# EAGLE board espButton (EAGLE 9.0.1)
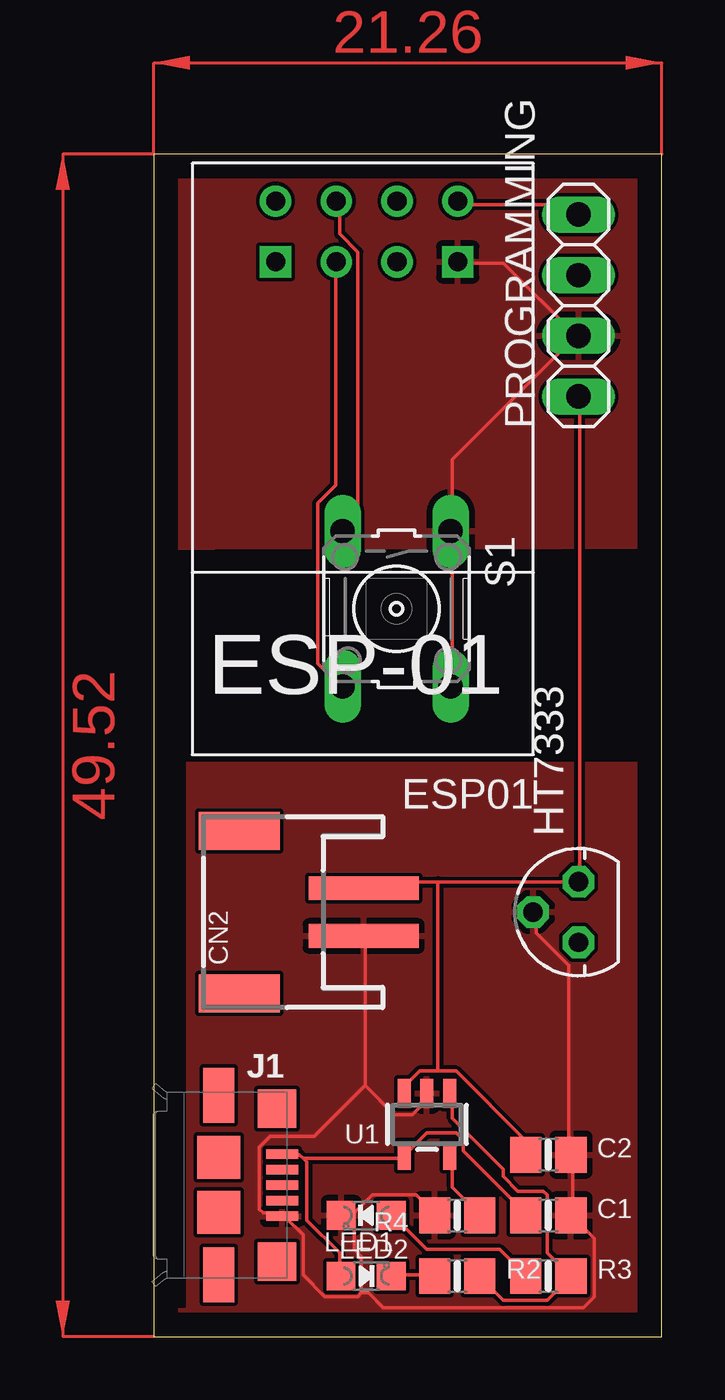
[diagram p0: board, top side]
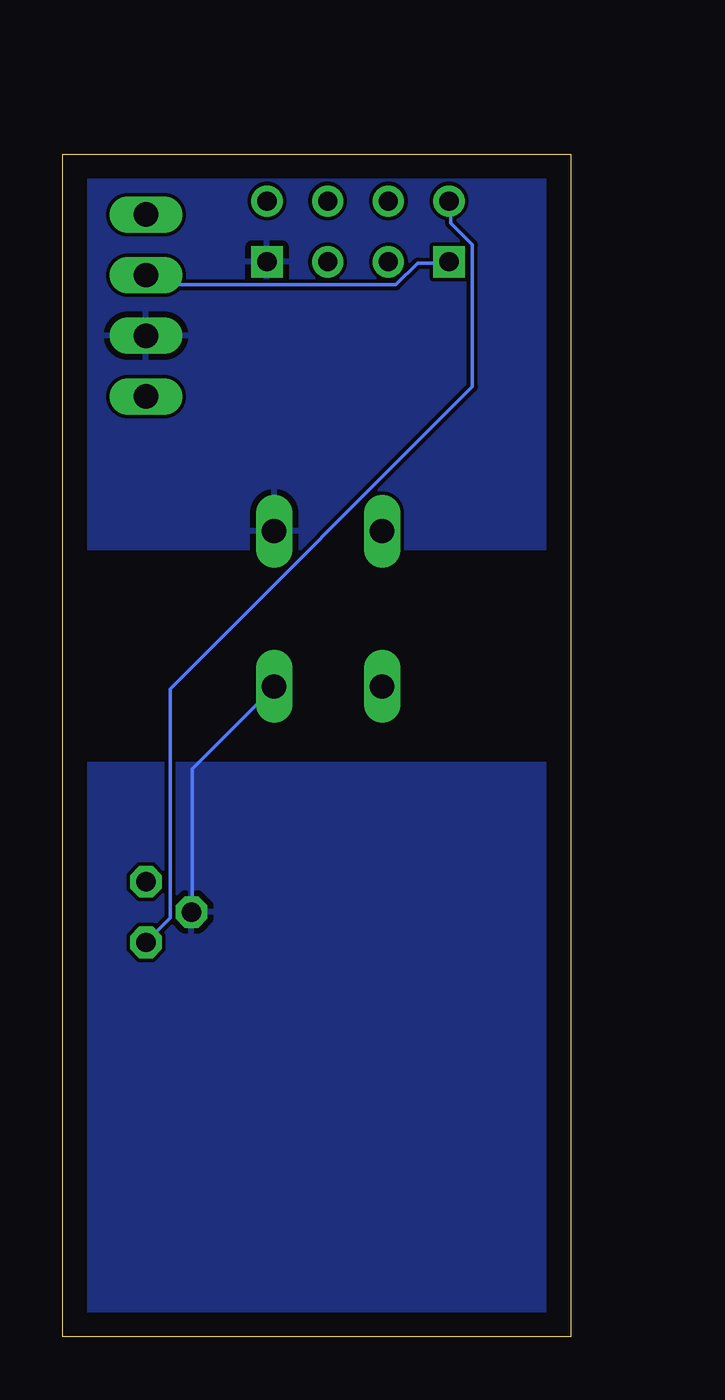
[diagram p1: board, bottom side, seen from below]

Size 21.26 x 49.52 mm. Coordinates in mm from the lower left corner, seen from the top.
Outline: 0,0 21.26,0 21.26,49.52 0,49.52 0,0
Copper layers (1*16): Top 0.035mm / dielectric 1.5mm / Bottom 0.035mm
Design rules "default": minimum track width 6mil, minimum drill 0.35mm, track to track 6mil, track to pad 6mil, pad to pad 6mil, via to via 6mil, smd to smd 6mil, copper to edge 40mil, drill to drill 6mil, minimum pad ring 10mil, minimum via ring 8mil, stop-mask expansion 4mil, vias tented up to drill 0mil, thermal gap 10mil

## Footprints (pad centres in the part's own frame; a part is rotated, then mirrored left to right if it is on the bottom)
0805-NO = smd 1.3 x 1.5: 1 -0.95,0; 2 0.95,0
JSTPH2 = smd 1 x 4.6: 1 -1,-3.7; 2 1,-3.7 | smd 1.6 x 3.4: NC1 -3.4,1.5; NC2 3.4,1.5
ESP01 = drill 0.8: CH_PD -1.285,-8.178; GPIO0 1.255,-5.638; GPIO2 -1.285,-5.638; RST 1.255,-8.178; TX -3.825,-8.178; VCC 3.795,-8.178 | drill 0.8 square: GND -3.825,-5.638; RX 3.795,-5.638
78LXX = drill 0.813 octagon: GND 0,1.905; IN 1.27,0; OUT -1.27,0
1981584-1 = smd 0.4 x 1.35: 1 -1.3,4.1; 2 -0.65,4.1; 3 0,4.1; 4 0.65,4.1; 5 1.3,4.1 | smd 1.8 x 1.8: M1 -1.15,1.45; M2 1.15,1.45 | smd 2.3 x 1.3: S1 -3.75,1.45; S2 3.75,1.45 | smd 1.6 x 1.6: S3 -3.2,3.885; S4 3.2,3.885
CHIPLED_0805_NOOUTLINE = smd 1.2 x 1.2: A 0,-1.05; C 0,1.05
1X04 = drill 1.016 long: 1 -3.81,0; 2 -1.27,0; 3 1.27,0; 4 3.81,0
B3F-10XX = drill 1.016 long: 1 -3.251,2.261; 2 3.251,2.261; 3 -3.251,-2.261; 4 3.251,-2.261
SOT23-5 = smd 0.55 x 1.2: 1 -0.95,-1.3; 2 0,-1.3; 3 0.95,-1.3; 4 0.95,1.3; 5 -0.95,1.3

## Placement (x,y rotation side)
C1  10µF  [0805-NO]  16.51,5.08 0 top
C2  10µF  [0805-NO]  16.51,7.62 0 top
CN2  JSTPH  [JSTPH2]  5.08,17.78 90 top
ESP01  ESP01  [ESP01]  8.89,39.37 180 top
HT7333  [78LXX]  17.78,17.78 90 top
J1  1981584-1  [1981584-1]  1.27,6.35 270 top
LED1  RED  [CHIPLED_0805_NOOUTLINE]  8.89,2.54 270 top
LED2  GREEN  [CHIPLED_0805_NOOUTLINE]  8.89,5.08 90 top
PROGRAMMING  [1X04]  17.78,43.18 90 top
R2  470  [0805-NO]  12.7,2.54 0 top
R3  470  [0805-NO]  16.51,2.54 0 top
R4  10K\  [0805-NO]  12.7,5.08 180 top
S1  [B3F-10XX]  10.16,30.48 270 top
U1  MCP73831T-2ACI/OT  [SOT23-5]  11.43,8.89 180 top

## Library data of the parts
C1 C2 CN2 LED1 LED2 R2-R4 U1 = microbuilder
ESP01 = esp8266modules
HT7333 PROGRAMMING = DC_LOAD_AU
J1 = audio amplifier example
S1 = DC_LOAD_AU; MPN: B3F-1000; OC_FARNELL: 176432; OC_NEWARK: 36M3542

## Nets
3V3: ESP01.VCC HT7333.OUT
BAT: C2.1 CN2.2 HT7333.IN PROGRAMMING.1 U1.3
GND: C1.2 C2.2 CN2.1 ESP01.GND HT7333.GND J1.5 LED2.C PROGRAMMING.2 R4.2 S1.1 S1.2 U1.2
N$1: C1.1 J1.1 LED1.A U1.4
N$3: LED1.C R2.1
N$4: ESP01.RST S1.3
N$6: R2.2 R3.2 U1.1
N$7: R4.1 U1.5
N$8: LED2.A R3.1
PRGM: ESP01.GPIO0 S1.4
RX: ESP01.TX PROGRAMMING.4
TX: ESP01.RX PROGRAMMING.3

## Tracks (layer width: path | path; a pad name or v marks a point on that pad's centre or on a via)
3V3
  Bottom 0.152: HT7333.OUT 16.76,17.53 16.76,27.13 4.12,39.78 4.12,45.72 5.03,46.63 5.03,47.4 ESP01.VCC
BAT
  Top 0.152: 11.89,11.12 12.65,11.12 15.54,8.23 15.54,7.62 C2.1 | 11.89,11.12 11.12,11.12 10.52,10.52 10.52,10.21 U1.3 | 11.89,19.05 8.99,19.05 8.84,18.9 CN2.2 | 11.89,19.05 HT7333.IN 17.83,19.05 17.83,39.32 PROGRAMMING.1 | 11.89,19.05 11.89,11.12
GND
  Top 0.152: 8.38,5.18 7.92,5.18 LED2.C 8.38,5.18 | 8.38,5.18 9.14,5.94 10.97,5.94 11.73,5.18 R4.2 | 8.84,10.52 10.06,9.3 10.82,9.3 11.12,9.6 11.12,9.75 11.43,10.06 U1.2 | 8.84,10.52 8.84,16.76 CN2.1 | 8.84,10.52 6.71,8.38 4.88,8.38 4.42,7.92 4.42,5.33 4.57,5.18 5.33,5.18 J1.5 5.49,5.03 6.25,4.27 6.25,2.59 7.16,1.68 8.53,1.68 8.69,1.83 | 8.38,5.18 8.38,3.66 8.69,3.35 8.69,1.83 | HT7333.GND 16,17.68 16,16.92 17.37,15.54 17.37,7.62 C2.2 17.53,7.62 17.53,5.18 C1.2 17.53,5.03 18.44,4.12 18.44,1.68 17.98,1.22 9.6,1.22 8.99,1.83 8.69,1.83 | S1.2 12.5,27.28 12.5,33.68 S1.1 12.5,33.83 12.5,36.73 17.68,41.91 | 17.68,41.91 14.63,44.96 12.8,44.96 ESP01.GND | 17.68,41.91 PROGRAMMING.2
  Bottom 0.152: HT7333.GND 15.85,17.83 15.85,23.77 12.5,27.13 S1.2
  pour Top: -11.75,51.15 31.51,51.15 31.6,51.06 31.6,33.06 -12,33 -12,51
  pour Top: -8,24 31,24 31,-2 -7,-2
  pour Bottom: -6,24 32,24 33,-1 -7,-1
  pour Bottom: -7,50 31,50 31,33 -6,33
N$1
  Top 0.152: 6.25,7.47 6.1,7.62 5.49,7.62 J1.1 | 6.25,7.47 6.4,7.32 6.4,4.88 7.77,3.5 7.77,2.59 LED1.A | 6.25,7.47 10.36,7.47 U1.4 10.52,7.62 11.43,8.53 12.65,8.53 12.95,8.23 12.95,7.77 15.54,5.18 C1.1
N$2
  cutout Top: 0,1.27 1.27,1.27 1.27,25.4 0,25.4
N$3
  Top 0.152: LED1.C 10.06,2.59 11.73,2.59 R2.1
N$4
  Top 0.152: ESP01.RST 7.77,47.4 7.77,46.18 8.53,45.41 8.53,34.44 7.92,33.83 S1.3
N$6
  Top 0.152: U1.1 12.5,10.06 12.5,9.14 14.63,7.01 14.63,6.71 15.24,6.1 16.31,6.1 16.46,5.94 16.46,3.5 17.37,2.59 R3.2 17.37,2.44 16.46,1.52 14.63,1.52 13.72,2.44 R2.2
N$7
  Top 0.152: U1.5 12.5,7.47 12.5,6.25 13.56,5.18 R4.1
N$8
  Top 0.152: LED2.A 10.06,5.03 11.43,3.66 14.48,3.66 15.54,2.59 R3.1
PRGM
  Top 0.152: ESP01.GPIO0 7.62,44.96 7.62,35.66 6.86,34.9 6.86,28.19 7.77,27.28 S1.4
RX
  Top 0.152: PROGRAMMING.4 17.37,47.4 12.8,47.4 ESP01.TX
TX
  Bottom 0.152: PROGRAMMING.3 17.37,44.04 7.32,44.04 6.4,44.96 5.18,44.96 ESP01.RX
(copper drawn outside any net)
  shapes: Top area x2

## Text on the board
silktop: VCC | GND | TX | RX